# EAGLE board Quadrupedv2.0 (EAGLE 9.6.2)
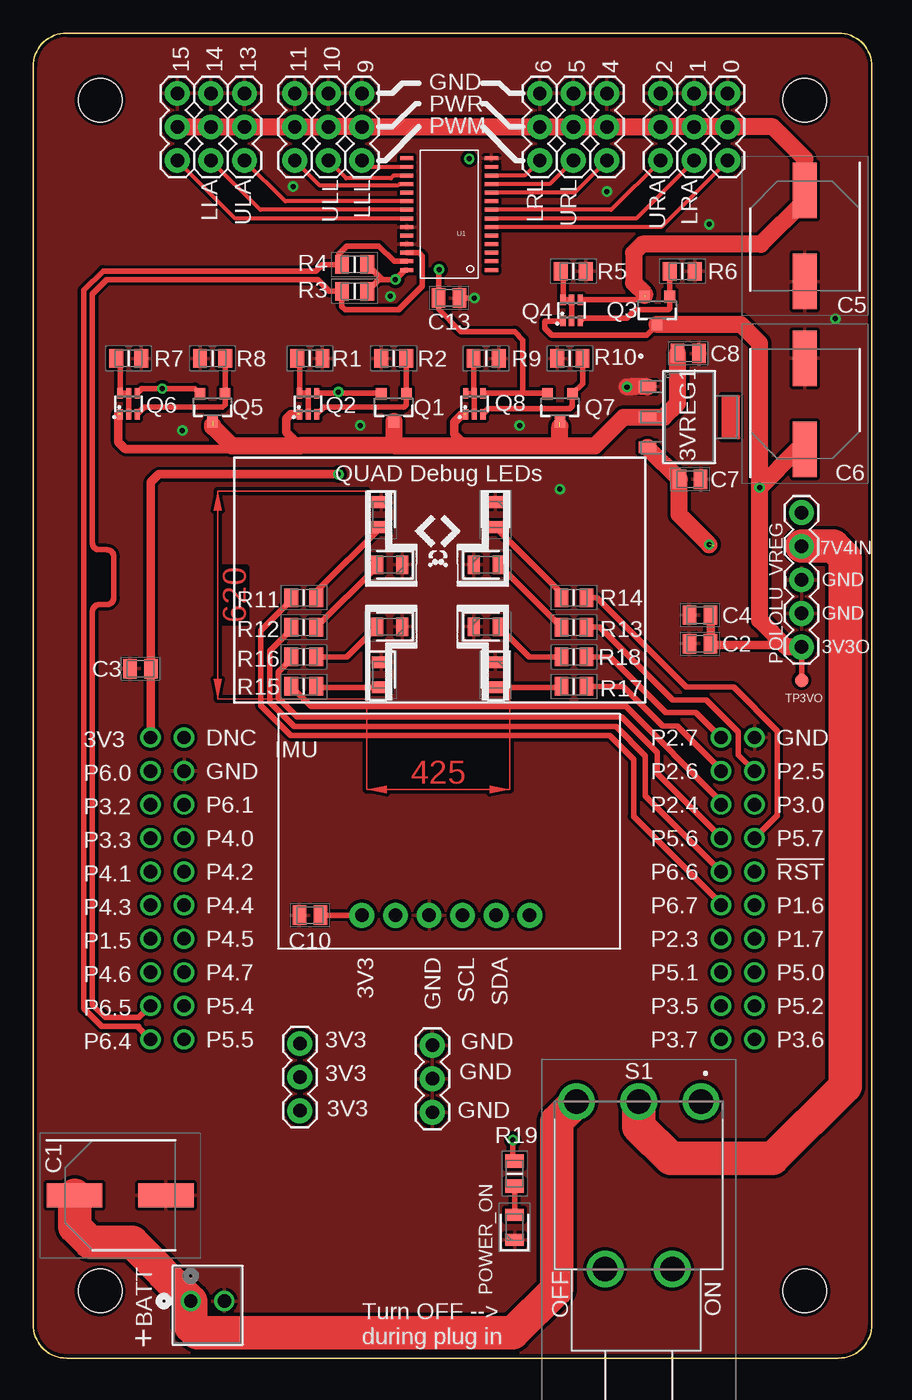
[diagram p0: board, top side]
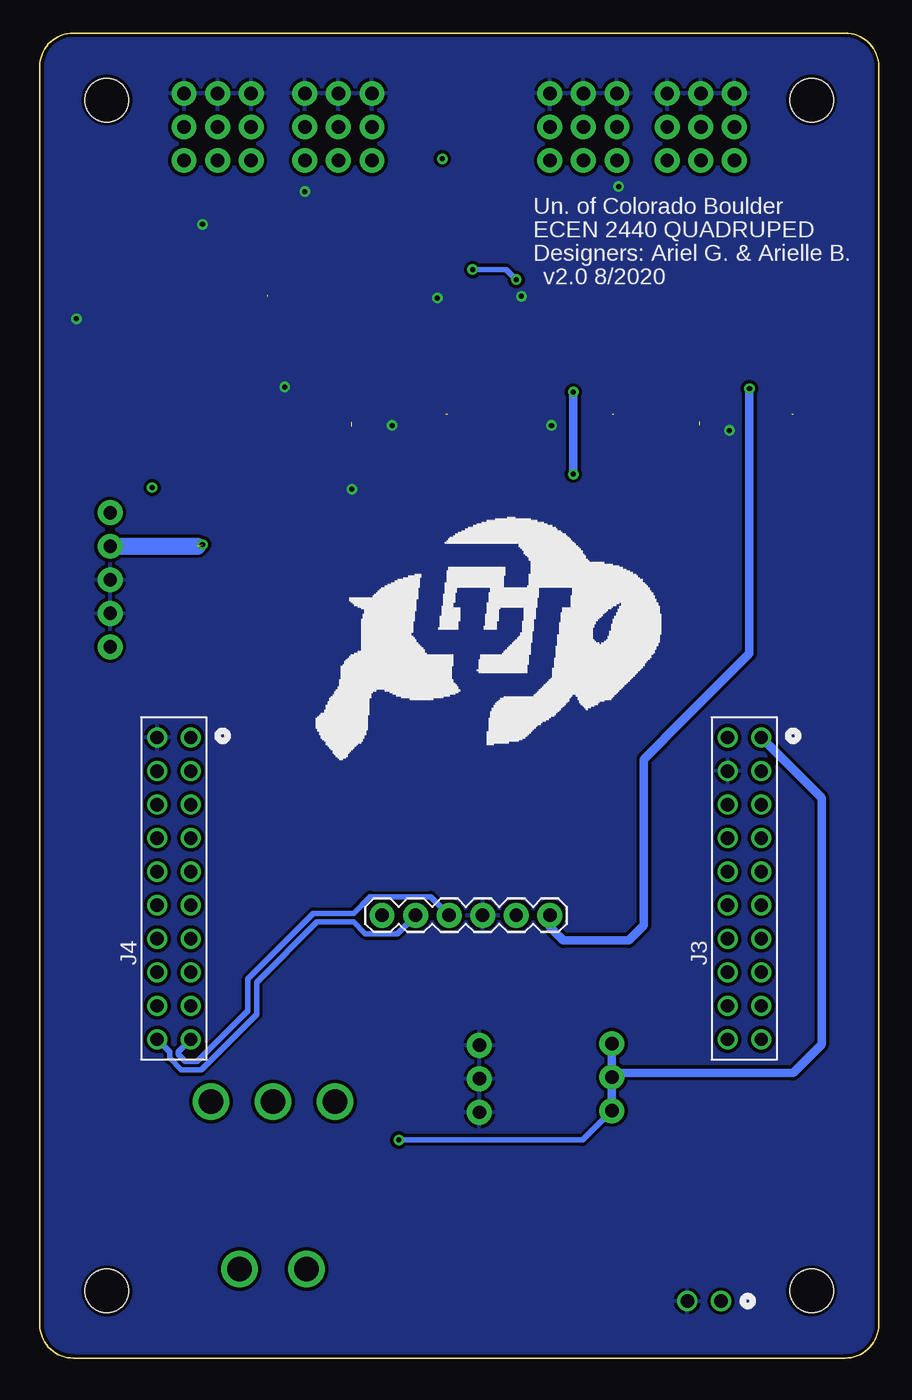
[diagram p1: board, bottom side, seen from below]

Size 63.5 x 100.33 mm. Coordinates in mm from the lower left corner, seen from the top.
Outline: 0,2.54 0,97.79 arc-90 2.54,100.33 60.96,100.33 arc-90 63.5,97.79 63.5,2.54 arc-90 60.96,0 2.54,0 arc-90 0,2.54
Copper layers (1*16): Top 0.035559375mm / dielectric 1.501140625mm / Bottom 0.035559375mm
Design rules "4pcb-33board": minimum track width 6mil, minimum drill 15mil, track to track 6mil, track to pad 6mil, pad to pad 6mil, via to via 6mil, smd to smd 6mil, copper to edge 10mil, drill to drill 10mil, minimum pad ring 10mil, minimum via ring 8mil, stop-mask expansion 4mil, vias tented up to drill 0mil, thermal gap 10mil
Net classes: 0 default: width 0.203 mm, drill 0.381 mm, clearance 0.254 mm; 1 DIFF_I2C1: width 0.406 mm, drill 0.381 mm, clearance 0.254 mm; 2 SERVOS: width 0.508 mm, drill 0.381 mm, clearance 0.254 mm; 3 DIFF_I2C2: width 0.406 mm, drill 0.381 mm, clearance 0.254 mm; 4 LOWCurrent: width 0.406 mm, drill 0.381 mm, clearance 0.254 mm; 5 PWM: width 0.305 mm, drill 0.381 mm, clearance 0.254 mm
Holes 3.3 mm at 5.08,5.08 58.42,5.08 58.42,95.25 5.08,95.25
tKeepout: area 18.5,31 to 44.5,48.8

## Footprints (pad centres in the part's own frame; a part is rotated, then mirrored left to right if it is on the bottom)
1X03MALE = drill 1.016 pad 1.88: 1 0,0; 2 2.54,0; 3 5.08,0
SOT-223_STM-L = smd 0.864 x 1.295: 1 -2.3,-3.15; 2 0,-3.15; 3 2.3,-3.15
CONN2_640456-2_TEC = drill 1.016 pad 1.524: 1 0,0; 2 -2.54,0
CAPAE830X650N = smd 4.2 x 1.8: 1 -3.45,0; 2 3.45,0
CAPC2012X88N = smd 1.02 x 1.47: 1 -0.8,0; 2 0.8,0
1X06 = drill 1.016 pad 1.88: 1 0,0; 2 2.54,0; 3 5.08,0; 4 7.62,0; 5 10.16,0; 6 12.7,0
SAMTEC_SSW-110-02-G = drill 1.016 pad 1.524: 1 22.86,-2.54; 2 22.86,0; 3 20.32,-2.54; 4 20.32,0; 5 17.78,-2.54; 6 17.78,0; 7 15.24,-2.54; 8 15.24,0; 9 12.7,-2.54; 10 12.7,0; 11 10.16,-2.54; 12 10.16,0; 13 7.62,-2.54; 14 7.62,0; 15 5.08,-2.54; 16 5.08,0; 17 2.54,-2.54; 18 2.54,0; 19 0,-2.54; 20 0,0
1X03_FEMALE = drill 1.016 pad 1.88: 1 0,0; 2 2.54,0; 3 5.08,0
LEDC2012X80N = smd 0.9 x 1.4: 1 -0.95,0; 2 0.95,0
1X05 = drill 1.016 pad 1.88: 1 0,0; 2 2.54,0; 3 5.08,0; 4 7.62,0; 5 10.16,0
SOT23-3 = smd 0.8 x 0.9: 1 -0.95,-1; 2 0.95,-1; 3 0,1.1
SOT363_PHILIPS = smd 0.4 x 0.8: 1 -0.65,-0.8; 2 0,-0.8; 3 0.65,-0.8; 4 0.65,0.8; 5 0,0.8; 6 -0.65,0.8
RESC2012X70N = smd 1.05 x 1.4: 1 -0.95,0; 2 0.95,0
E101SD1AQE = drill 1.85 pad 2.775: 1 0,0; 2 -4.7,0; 3 -9.4,0; MH1 -7.24,-12.7; MH2 -2.16,-12.7
PAD.03X.04 = smd 1.016 x 1.016: P$1 0,0
TSSOP-28_4MM = smd 1 x 0.3: 1 -3.2,4.225; 2 -3.2,3.575; 3 -3.2,2.925; 4 -3.2,2.275; 5 -3.2,1.625; 6 -3.2,0.975; 7 -3.2,0.325; 8 -3.2,-0.325; 9 -3.2,-0.975; 10 -3.2,-1.625; 11 -3.2,-2.275; 12 -3.2,-2.925; 13 -3.2,-3.575; 14 -3.2,-4.225; 15 3.2,-4.225; 16 3.2,-3.575; 17 3.2,-2.925; 18 3.2,-2.275; 19 3.2,-1.625; 20 3.2,-0.975; 21 3.2,-0.325; 22 3.2,0.325; 23 3.2,0.975; 24 3.2,1.625; 25 3.2,2.275; 26 3.2,2.925; 27 3.2,3.575; 28 3.2,4.225

## Placement (x,y rotation side)
0  [1X03MALE]  52.58,95.76 270 top
1  [1X03MALE]  50.04,95.76 270 top
2  [1X03MALE]  47.5,95.76 270 top
3VREG1  LD1117S50TRSOT-223_STM-L  [SOT-223_STM-L]  49.66,71.25 270 top
4  [1X03MALE]  43.43,95.76 270 top
5  [1X03MALE]  40.89,95.76 270 top
6  [1X03MALE]  38.35,95.76 270 top
9  [1X03MALE]  24.89,95.76 270 top
10  [1X03MALE]  22.35,95.76 270 top
11  [1X03MALE]  19.81,95.76 270 top
13  [1X03MALE]  16,95.76 270 top
14  [1X03MALE]  13.46,95.76 270 top
15  [1X03MALE]  10.92,95.76 270 top
BATT  640456-2  [CONN2_640456-2_TEC]  11.94,4.32 180 top
C1  EEE-1EA101UP  [CAPAE830X650N]  6.6,12.32 0 top
C2  0.1uF  [CAPC2012X88N]  50.48,54.1 180 top
C3  C0805C104K5RAC7411  [CAPC2012X88N]  8.13,52.2 180 top
C4  0.1uF  [CAPC2012X88N]  50.48,56.26 180 top
C5  EEE-1EA101UP  [CAPAE830X650N]  58.42,84.96 270 top
C6  EEE-1EA101UP  [CAPAE830X650N]  58.42,72.26 90 top
C7  C0805C104K5RAC7411  [CAPC2012X88N]  49.72,66.55 0 top
C8  C0805C104K5RAC7411  [CAPC2012X88N]  49.59,76.07 0 top
C10  C0805C104K5RAC7411  [CAPC2012X88N]  20.95,33.53 180 top
C13  C0805C104K5RAC7411  [CAPC2012X88N]  31.5,80.26 0 top
IMU  [1X06]  24.89,33.53 180 bottom
J3  SSW-110-02-G-D  [SAMTEC_SSW-110-02-G]  11.43,24.13 90 bottom
J4  SSW-110-02-G-D  [SAMTEC_SSW-110-02-G]  54.61,24.13 90 bottom
J6  [1X03_FEMALE]  30.23,18.61 90 top
J7  [1X03_FEMALE]  20.19,23.81 270 top
LLA  150080RS75000  [LEDC2012X80N]  26.34,63.87 270 top
LLL  150080RS75000  [LEDC2012X80N]  26.34,51.74 270 top
LRA  150080RS75000  [LEDC2012X80N]  35,63.87 270 top
LRL  150080RS75000  [LEDC2012X80N]  35,51.74 270 top
POLOLU_VREG  [1X05]  58.17,53.85 90 top
POWER_ON  150080RS75000  [LEDC2012X80N]  36.45,9.91 90 top
Q1  2.5A/30V/105mΩ  [SOT23-3]  27.3,72.01 180 top
Q2  [SOT363_PHILIPS]  20.83,72.26 0 top
Q3  2.5A/30V/105mΩ  [SOT23-3]  47.24,79.38 180 top
Q4  [SOT363_PHILIPS]  40.77,79.33 0 top
Q5  2.5A/30V/105mΩ  [SOT23-3]  13.59,72.01 180 top
Q6  [SOT363_PHILIPS]  7.24,72.26 0 top
Q7  2.5A/30V/105mΩ  [SOT23-3]  39.88,72.01 180 top
Q8  [SOT363_PHILIPS]  33.4,72.26 0 top
R1  10k  [RESC2012X70N]  20.95,75.69 180 top
R2  47k  [RESC2012X70N]  27.3,75.69 0 top
R3  ERJ-6ENF1000V  [RESC2012X70N]  24.33,80.77 0 top
R4  ERJ-6ENF1000V  [RESC2012X70N]  24.33,82.8 0 top
R5  10k  [RESC2012X70N]  40.89,82.3 180 top
R6  47k  [RESC2012X70N]  49.15,82.3 180 top
R7  10k  [RESC2012X70N]  7.24,75.69 180 top
R8  47k  [RESC2012X70N]  13.59,75.69 0 top
R9  10k  [RESC2012X70N]  34.29,75.69 180 top
R10  47k  [RESC2012X70N]  40.64,75.69 0 top
R11  ERJ-6ENF1000V  [RESC2012X70N]  20.5,57.58 0 top
R12  ERJ-6ENF1000V  [RESC2012X70N]  20.5,55.34 0 top
R13  ERJ-6ENF1000V  [RESC2012X70N]  40.94,55.34 180 top
R14  ERJ-6ENF1000V  [RESC2012X70N]  40.94,57.58 180 top
R15  ERJ-6ENF1000V  [RESC2012X70N]  20.5,50.85 0 top
R16  ERJ-6ENF1000V  [RESC2012X70N]  20.5,53.09 0 top
R17  ERJ-6ENF1000V  [RESC2012X70N]  40.94,50.85 180 top
R18  ERJ-6ENF1000V  [RESC2012X70N]  40.94,53.09 180 top
R19  ERJ-6ENF1000V  [RESC2012X70N]  36.45,13.97 270 top
S1  E101SD1AQE  [E101SD1AQE]  50.55,19.43 0 top
TP22  TEST-POINT3X4  [PAD.03X.04]  58.17,51.31 90 top
U1  PCA9685  [TSSOP-28_4MM]  31.5,86.61 180 top
U$1  [DEBUGLEDS]  25.15,49.78 0 top
U$2  [SKUBUFFS]  45.21,37.59 0 bottom
ULA  150080RS75000  [LEDC2012X80N]  27,60.07 180 top
ULL  150080RS75000  [LEDC2012X80N]  27,55.39 180 top
URA  150080RS75000  [LEDC2012X80N]  34.3,60.07 0 top
URL  150080RS75000  [LEDC2012X80N]  34.3,55.39 0 top

## Library data of the parts
0 1 2 4-6 9-11 13-15 J6 J7 POLOLU_VREG TP22 = SparkFun-Connectors
3VREG1 = LD1117S50TR; BUILT_BY: EMA_UL_Team; MANUFACTURER_PART_NUMBER: LD1117S50TR; SOURCELIBRARY: StMicro_2011-06-07; VENDOR: STMicroelectronics
BATT = JST_POWER; BUILT_BY: EMA_UL_Team; COPYRIGHT: Copyright (C) 2016 Accelerated Designs. All rights reserved; DESCRIPTION: 02P MTA100 HDR ASSY F/L SQ STR; MANUFACTURER_PART_NUMBER: 640456-2; PITCH_MM_: 2.54; POSITIONS: 2; PRODUCT: Connector; ROWS-CONFIG: 1; SOURCELIBRARY: TE_Connectivity-2018-03-16; TE_PART_NUMBER: 640456-2; TYPE: Header; VENDOR: TE Connectivity
C1 C5 C6 = EEE-1EA101UP; DESCRIPTION: Cap Aluminum Lytic 100uF 25V 20% (8 X 6.2mm) SMD 91mA 2000h 85C Automotive T/R; HEIGHT: 6.5mm; MANUFACTURER_NAME: Panasonic; MANUFACTURER_PART_NUMBER: EEE-1EA101UP; MOUSER_PART_NUMBER: 667-EEE-1EA101UP; MOUSER_PRICE-STOCK: https://www.mouser.com/Search/Refine.aspx?Keyword=667-EEE-1EA101UP
C2-C4 C7 C8 C10 C13 = C0805C104K5RAC7411; DESCRIPTION: Cap Ceramic 0.1uF 50V X7R 10% Pad SMD 0805 125C T/R; HEIGHT: 0.88mm; MANUFACTURER_NAME: Kemet; MANUFACTURER_PART_NUMBER: C0805C104K5RAC7411; MOUSER_PART_NUMBER: 80-C0805C104K5RACLR; MOUSER_PRICE-STOCK: https://www.mouser.co.uk/ProductDetail/KEMET/C0805C104K5RAC7411?qs=jbRM9o5BbzPcVXF0wW9AYg%3D%3D
IMU = SparkFun-Connectors; PROD_ID: CONN-08437
J3 J4 = SSW-110-02-G-D; DESCRIPTION: 20 Position, .100&quot; Tiger Buy&trade; Socket Strip; HEIGHT: mm; MANUFACTURER_NAME: SAMTEC; MANUFACTURER_PART_NUMBER: SSW-110-02-G-D; MOUSER_PART_NUMBER: 200-SSW11002GD; MOUSER_PRICE-STOCK: https://www.mouser.co.uk/ProductDetail/Samtec/SSW-110-02-G-D?qs=iT52DjcXudsm22Pawb3w1g%3D%3D
LLA LLL LRA LRL POWER_ON ULA ULL URA URL = 150080RS75000; DESCRIPTION: LED,Wurth Elektronik,150080RS75000 Wurth Elektronik 150080RS75000, WL-SMCW Series Red LED, 625 nm 2012 (0805) Clear, Rectangle Lens SMD package; HEIGHT: 0.8mm; MANUFACTURER_NAME: Wurth Elektronik; MANUFACTURER_PART_NUMBER: 150080RS75000; MOUSER_PART_NUMBER: 710-150080RS75000; MOUSER_PRICE-STOCK: https://www.mouser.co.uk/ProductDetail/Wurth-Elektronik/150080RS75000?qs=LlUlMxKIyB2jdCo7bnfgew%3D%3D
Q1 Q3 Q5 Q7 = SparkFun-DiscreteSemi; PROD_ID: TRANS-11308
Q2 Q4 Q6 Q8 = SparkFun-DiscreteSemi; PROD_ID: TRAN-14386
R1-R19 = ERJ-6ENF1000V; DESCRIPTION: RESISTOR, 0805 100 OHM +/- 1 % 0.125 W; HEIGHT: 0.7mm; MANUFACTURER_NAME: Panasonic; MANUFACTURER_PART_NUMBER: ERJ-6ENF1000V; MOUSER_PART_NUMBER: 667-ERJ-6ENF1000V; MOUSER_PRICE-STOCK: https://www.mouser.co.uk/ProductDetail/Panasonic/ERJ-6ENF1000V?qs=4WZYzuGhm5opkpyunBjW%2FA%3D%3D
S1 = E101SD1AQE; DESCRIPTION: Toggle Switches ON None ON SPDT 7.5A 250VAC 28VDC; HEIGHT: 6.6mm; MANUFACTURER_NAME: C & K COMPONENTS; MANUFACTURER_PART_NUMBER: E101SD1AQE; MOUSER_PART_NUMBER: 611-E101SD1AQE; MOUSER_PRICE-STOCK: https://www.mouser.com/Search/Refine.aspx?Keyword=611-E101SD1AQE
U1 = SparkFun-IC-Special-Function; PROD_ID: IC-12271
U$1 = DEBUGLEDS1
U$2 = CU LOGO

## Nets
3V3 [LOWCurrent]: 3VREG1.2 C8.1 Q1.3 Q2.1 Q5.3 Q6.1 Q7.3 Q8.1
3V3_OUT: C2.1 C4.1 C6.1 POLOLU_VREG.1 Q3.3 Q4.1 TP22.P$1
!RST: J4.10
A0: U1.1
A1: U1.2
A2: U1.3
A3: U1.4
A4: U1.5
A5: U1.24
BATTERY+: BATT.1 C1.1 S1.3
CH0 [PWM]: 0.3 U1.6
CH1 [PWM]: 1.3 U1.7
CH2 [PWM]: 2.3 U1.8
CH3 [PWM]: U1.9
CH4 [PWM]: 4.3 U1.10
CH5 [PWM]: 5.3 U1.11
CH6 [PWM]: 6.3 U1.12
CH7 [PWM]: U1.13
CH8 [PWM]: U1.15
CH9 [PWM]: 9.3 U1.16
CH10 [PWM]: 10.3 U1.17
CH11 [PWM]: 11.3 U1.18
CH12 [PWM]: U1.19
CH13 [PWM]: 13.3 U1.20
CH14 [PWM]: 14.3 U1.21
CH15 [PWM]: 15.3 U1.22
ENABLE: POLOLU_VREG.5
GND: 0.1 1.1 2.1 3VREG1.1 4.1 5.1 6.1 9.1 10.1 11.1 13.1 14.1 15.1 BATT.2 C1.2 C2.2 C3.2 C4.2 C5.2 C6.2 C7.2 C8.2 C10.2 C13.2 IMU.3 J3.4 J4.2 J6.1 J6.2 J6.3 LLA.1 LLL.1 LRA.1 LRL.1 POLOLU_VREG.2 POLOLU_VREG.3 POWER_ON.1 R1.1 R2.1 R5.1 R6.1 R7.1 R8.1 R9.1 R10.1 U1.14 U1.23 U1.25 ULA.1 ULL.1 URA.1 URL.1
IMU_3V3 [LOWCurrent]: C10.1 IMU.1 Q5.2 Q6.4
IMU_N [DIFF_I2C2]: IMU.4 J4.19
IMU_P [DIFF_I2C2]: IMU.5 J4.20
MSP_3V3 [LOWCurrent]: C3.1 J3.1 J7.1 J7.2 J7.3 Q1.2 Q2.4 R19.1
N$2: R12.2 ULA.2
N$3: Q7.1 Q8.3 R10.2
N$4: Q8.2 Q8.5 Q8.6 R9.2
N$5: Q1.1 Q2.3 R2.2
N$6: Q2.2 Q2.5 Q2.6 R1.2
N$7: LLA.2 R11.2
N$8: R16.2 ULL.2
N$9: Q5.1 Q6.3 R8.2
N$10: Q6.2 Q6.5 Q6.6 R7.2
N$11: LLL.2 R15.2
N$12: R13.2 URA.2
N$13: LRA.2 R14.2
N$14: R18.2 URL.2
N$15: LRL.2 R17.2
N$16: Q4.2 Q4.5 Q4.6 R5.2
N$17: Q3.1 Q4.3 R6.2
N$19: POWER_ON.2 R19.2
P1.5_SPICLK_J1.7: J3.13
P1.6_SPIMOSI_J2.15: J4.12
P1.7_SPIMISO_J2.14: J4.14
P2.3_IO_J4.34: J4.13
P2.4_PWM_J4.38: J4.5 R15.1
P2.5_PWM_J2.19: J4.4 R13.1
P2.6_PWM_J4.39: J4.3 R17.1
P2.7_PWM_J4.40: J4.1 R18.1
P3.0_IO_J2.18: J4.6
P3.2_URXD_J1.3: J3.5
P3.3_UTXD_J1.4: J3.7
P3.5_IO_J4.32: J4.17
P4.0_A13_J3.24: J3.8
P4.1_IO_J1.5: J3.9
P4.2_A11_J3.25: J3.10
P4.3_A10_J1.6: J3.11
P4.4_A9_J3.26: J3.12
P4.5_A8_J3.27: J3.14
P4.6_IO_J1.8: J3.15
P4.7_A6_J3.28: J3.16
P5.0_IO_J2.13: J4.16
P5.1_IO_J4.33: J4.15
P5.2_IO_J2.12: J4.18
P5.4_IO_J3.29: J3.18
P5.5_IO_J3.30: J3.20
P5.6_PWM_J4.37: J4.7 R16.1
P5.7_IO_J2.17: J4.8 R14.1
P6.0_A15_J1.2: J3.3
P6.1_A14_J3.23: J3.6
P6.6_CAPTURE_J4.36: J4.9 R12.1
P6.7_CAPTURE_J4.35: J4.11 R11.1
PCA_3V3 [LOWCurrent]: C13.1 Q7.2 Q8.4 R3.2 R4.2 U1.28
SERVO: 0.2 1.2 2.2 4.2 5.2 6.2 9.2 10.2 11.2 13.2 14.2 15.2 C5.1 Q3.2 Q4.4
SERVO_N [DIFF_I2C1]: J3.19 R4.1 U1.27
SERVO_P [DIFF_I2C1]: J3.17 R3.1 U1.26
SWITCH: 3VREG1.3 C7.1 POLOLU_VREG.4 S1.2

## Tracks (layer width: path | path; a pad name or v marks a point on that pad's centre or on a via)
3V3  (5 unrouted)
  Top 0.406: Q1.3 27.43,70.78
  Top 0.508: 39.88,70.87 Q7.3 | Q1.3 27.48,71.08
  Top 0.635: 15.03,69.09 14.78,68.83 6.99,68.83 6.46,69.36 6.46,71.46 | 32.77,69.09 32.75,69.1 31.88,69.98 31.88,70.87 32.47,71.46 32.63,71.46 | 20.19,69.09 19.18,70.1 19.18,71.12 19.52,71.46 20.05,71.46
  Top 1.27: 27.43,69.09 20.19,69.09 15.03,69.09 13.59,70.53 13.59,70.65 | 27.43,69.09 32.77,69.09 40.13,69.09 | 40.13,69.09 42.55,69.09 44.7,71.25 3VREG1.2 47.75,71.25 48.79,72.29 C8.1 | 40.13,69.09 39.88,69.34 39.88,70.54 | Q1.3 27.3,69.22 27.43,69.09
3V3_OUT  (via drill 0.38)
  Top 0.406: Q4.1 38.77,78.53 38.73,78.49 38.73,77.98 39.24,77.47 46.44,77.47 Q3.3 | 51.41,53.98 C2.1 | TP22.P$1 POLOLU_VREG.1
  Top 0.508: 58.17,68.56 C6.1
  Top 0.635: POLOLU_VREG.1 58.04,53.98 51.41,53.98 | C2.1 C4.1
  Top 1.27: v54.99,65.91 54.99,55.88 57.02,53.85 POLOLU_VREG.1 | v54.99,65.91 54.99,76.83 53.55,78.28 Q3.3 | v54.99,65.91 57.89,68.81 C6.1
BATTERY+
  Top 2.54: C1.1 3.15,9.93 4.32,8.76 7.49,8.76 BATT.1 11.94,2.41 12.45,1.91 36.32,1.91 39.62,5.21 39.62,17.91 S1.3
CH0
  Top 0.305: 0.3 47.54,85.64 U1.6
CH1
  Top 0.305: 1.3 45.65,86.29 U1.7
CH2
  Top 0.305: 2.3 43.76,86.94 U1.8
CH4
  Top 0.305: 4.3 40.99,88.24 U1.10
CH5
  Top 0.305: 5.3 39.1,88.89 U1.11
CH6
  Top 0.305: 6.3 37.22,89.54 U1.12
CH9
  Top 0.305: U1.16 25.38,90.19 9.3
CH10
  Top 0.305: U1.17 27.29,89.54 27.08,89.33 23.7,89.33 10.3
CH11
  Top 0.305: U1.18 27.72,88.89 27.61,88.77 21.72,88.77 11.3
CH13
  Top 0.305: U1.20 19.09,87.59 13.3
CH14
  Top 0.305: U1.21 17.2,86.94 14.3
CH15
  Top 0.305: U1.22 15.31,86.29 15.3
GND  (via drill 0.38)
  Top 0.406: v33.4,80.26 C13.2 | 36.35,8.86 POWER_ON.1
  Top 1.27: 3VREG1.1 45.23,73.55 45.21,73.53 v44.96,73.53
  other vias: 39.88,65.79 60.73,78.69 27.05,80.39 51.18,85.85 36.83,70.61 24.77,70.61 11.3,70.23 19.68,88.71 43.43,88.33
  pour Top: -1.78,-2.03 -1.78,103.38 65.53,103.38 65.53,-2.03
  pour Bottom: -2.49,-2.54 -2.49,106.58 66.04,106.58 66.04,-2.54
IMU_3V3  (via drill 0.38)
  Top 0.406: 12.44,72.81 Q5.2 12.24,73.41 v9.78,73.41 8.24,73.41 Q6.4 | IMU.1 C10.1
  Bottom 0.635: IMU.1 24.89,32.64 23.88,31.62 18.92,31.62 17.78,32.77 17.78,45.34 14.67,48.45 9.78,53.34 v9.78,73.41
IMU_N
  Bottom 0.406: J4.19 53.01,23.19 53.01,22.99 52.5,22.48 51.56,22.48 47.75,26.29 47.75,28.72 42.79,33.68 39.75,33.68 38.51,34.92 33.91,34.92 IMU.4
IMU_P
  Bottom 0.406: J4.20 53.67,23.19 53.67,22.71 52.77,21.82 51.29,21.82 47.09,26.02 47.09,28.45 42.52,33.02 39.75,33.02 38.86,32.13 36.45,32.13 IMU.5
MSP_3V3  (via drill 0.38)
  Top 0.406: v23.11,73.15 23.11,73.06 Q2.4 26.3,73.06 Q1.2 | R19.1 36.32,15.05 v36.32,16.51
  Top 0.635: J3.1 8.93,47.03 C3.1 8.93,66.33 9.53,66.93 v23.11,66.93
  Bottom 0.406: J7.3 22.42,16.51 v36.32,16.51
  Bottom 0.635: v23.11,73.15 v23.11,66.93 | J3.1 4.32,42.42 4.32,23.75 6.48,21.59 19.88,21.59 J7.2 | J7.1 J7.2 | J7.3 J7.2
N$2
  Top 0.406: R12.2 26.05,59.94 ULA.2
N$3
  Top 0.406: R10.2 41.59,73.77 Q7.1 40.83,72.07 40.64,71.88 34.47,71.88 Q8.3
N$4
  Top 0.305: Q8.5 Q8.6
  Top 0.406: Q8.2 Q8.5 33.34,73.12 R9.2
N$5
  Top 0.406: Q2.3 22.03,72.01 28.07,72.01 28.25,72.2 Q1.1 R2.2
N$6
  Top 0.406: Q2.2 Q2.5 Q2.6 20.18,75.52 R1.2
N$7
  Top 0.406: 26.34,62.85 LLA.2 21.45,58.03 R11.2
N$8
  Top 0.406: ULL.2 23.75,53.09 R16.2
N$9
  Top 0.406: Q6.3 8.43,72 14.34,72 14.54,72.2 Q5.1 R8.2
N$10
  Top 0.406: R7.2 6.59,75.39 Q6.6 Q6.5 Q6.2
N$11
  Top 0.406: LLL.2 21.51,50.79 R15.2
N$12
  Top 0.406: R13.2 URA.2
N$13
  Top 0.406: R14.2 39.99,57.92 LRA.2
N$14
  Top 0.406: R18.2 37.55,53.09 URL.2
N$15
  Top 0.406: LRL.2 39.93,50.79 R17.2
N$16
  Top 0.406: Q4.2 Q4.5 Q4.6 40.12,82.12 R5.2
N$17
  Top 0.406: Q4.3 41.63,78.74 44.94,78.74 45.59,79.39 48.09,79.39 48.19,79.49 Q3.1 R6.2
N$19
  Top 0.406: POWER_ON.2 R19.2
N$20  (via drill 0.38)
  other vias: 33.02,90.81
P2.4_PWM_J4.38
  Top 0.406: 51.97,41.91 J4.5 52.07,42.16 44.89,49.34 21.06,49.34 R15.1
P2.5_PWM_J2.19
  Top 0.406: J4.4 53.39,45.67 53.39,47.39 50.96,49.83 48.42,49.83 42.91,55.34 R13.1
P2.6_PWM_J4.39
  Top 0.406: J4.3 52.07,44.58 48.77,47.88 47.66,47.88 44.69,50.85 R17.1
P2.7_PWM_J4.40
  Top 0.406: J4.1 50.16,48.9 47.87,48.9 43.67,53.09 R18.1
P5.6_PWM_J4.37
  Top 0.406: J4.7 52.07,39.46 47.24,44.28 47.24,45.85 44.56,48.53 20,48.53 18.57,49.96 18.57,51.94 19.55,52.92 R16.1
P5.7_IO_J2.17
  Top 0.406: J4.8 56.34,41.1 56.34,47.49 53.02,50.81 49.43,50.81 42.66,57.58 R14.1
P6.6_CAPTURE_J4.36
  Top 0.406: 52.07,37.45 J4.9 46.35,42.55 46.35,45.59 44.14,47.81 19.79,47.81 17.91,49.69 17.91,53.52 19.55,55.16 R12.1
P6.7_CAPTURE_J4.35
  Top 0.406: 52.07,34.76 52.07,34.42 | 52.07,34.42 J4.11 | R11.1 19.55,57.41 17.25,55.1 17.25,49.41 19.51,47.15 43.66,47.15 45.47,45.34 45.47,41.02 52.07,34.42
PCA_3V3  (via drill 0.38)  (1 unrouted)
  Top 0.406: Q8.4 37.08,73.06 | Q7.2 38.88,73.06 37.08,73.06 | v30.73,82.42 30.7,82.39 C13.1 30.7,79.41 32.38,77.72 36.45,77.72 37.08,77.09 37.08,73.06 | 27.47,81.63 v27.43,81.66 | v27.43,81.66 26.43,81.66 | 26.43,81.66 R4.2 | U1.28 28.15,82.38 v27.43,81.66 | R3.2 26.17,81.66 26.43,81.66
  Bottom 0.406: v27.43,81.66 28.19,82.42 v30.73,82.42
SERVO  (1 unrouted)
  Top 0.406: Q4.4 46.04,80.12 Q3.2
  Top 1.27: 0.2 53.34,93.22 | 58.28,88.28 C5.1 | 15.2 14.2 13.2 11.2 10.2 9.2 6.2 5.2 4.2 2.2 1.2 0.2 | C5.1 58.42,87.65 55.1,84.33 46.1,84.33 45.47,83.69 45.47,81.41 46.29,80.58 46.29,80.48 | C5.1 58.42,90.81 56.01,93.22 0.2
SERVO_N
  Top 0.406: R4.1 23.14,82.8 23.14,83.59 23.75,84.2 26.16,84.2 27.32,83.04 U1.27 | R4.1 23.38,83.33 | J3.19 8,25.02 8,25.12 5.19,25.12 3.83,26.47 3.83,80.84 5.3,82.3 21.4,82.3 21.9,82.8 R4.1
SERVO_P
  Top 0.406: J3.17 8,25.78 5.46,25.78 4.5,26.75 4.5,56.53 arc-90 5.02,57.05 5.59,57.05 arc90 6.11,57.58 6.11,60.68 arc90 5.59,61.2 5.02,61.2 arc-90 4.5,61.72 4.5,80.57 5.57,81.64 21.55,81.64 22.42,80.77 R3.1 23.38,79.61 23.62,79.38 27.69,79.38 29.46,81.15 29.46,83.44 29.21,83.69 U1.26
SWITCH  (via drill 0.38)  (1 unrouted)
  Top 0.508: 46.48,68.92 3VREG1.3
  Top 1.27: 3VREG1.3 48.91,66.55 | 48.91,66.55 C7.1 | 48.9,66.54 48.91,66.55 | v51.18,61.59 48.91,63.87 48.91,66.55
  Top 2.54: POLOLU_VREG.4 60.58,61.47 61.47,60.58 61.47,20.57 56.01,15.11 48.26,15.11 45.85,17.53 S1.2
  Bottom 1.27: POLOLU_VREG.4 51.56,61.47
(copper drawn outside any net)
  shapes: Top area x2

## Text on the board
tPlace: QUAD Debug LEDs | P2.7 | GND | P6.0 | GND | P2.6 | P2.5 | P3.2 | P6.1 | P2.4 | P3.0 | P3.3 | P4.0 | P5.6 | P5.7 | P4.1 | P4.2 | P6.6 | !RST | P4.3 | P4.4 | P6.7 | P1.6 | P1.5 | P4.5 | P2.3 | P1.7 | P4.7 | P5.1 | P5.0 | P4.6 | P6.5 | P5.4 | P3.5 | P5.2 | P6.4 | P5.5 | 3V3 | P3.7 | P3.6 | 3V3 | 3V3
tNames: GND | PWR | PWM | LLA | ULA | ULL | LLL | LRL | LRA | URL | URA | 7V4IN | GND | GND | 3V3O | TP3VO | 3V3 | DNC | 3V3 | GND | SCL | SDA | GND | GND | GND | OFF | ON | + | Turn OFF --> / during plug in
bNames: Un. of Colorado Boulder | ECEN 2440 QUADRUPED | Designers: Ariel G. & Arielle B. | v2.0 8/2020